# EAGLE board WaterDetector (EAGLE 7.4.0)
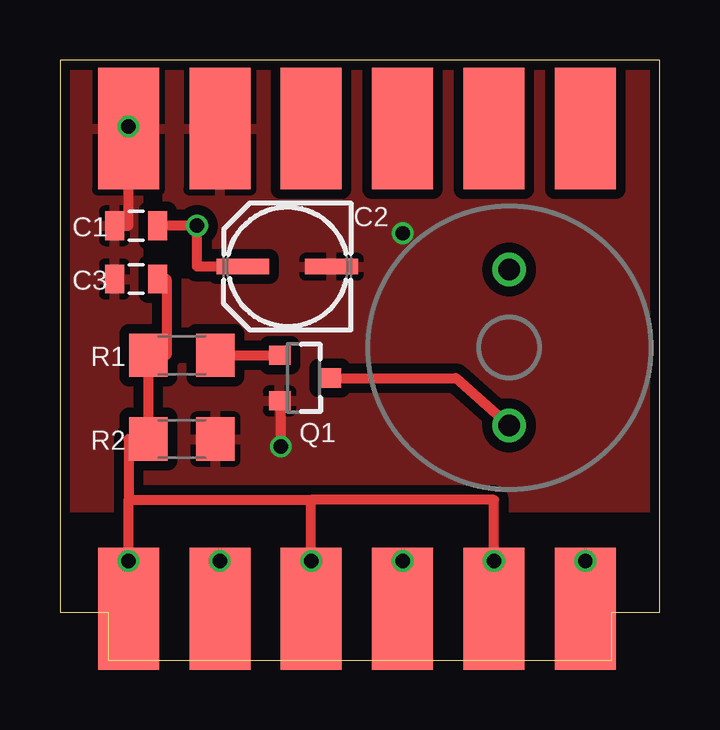
[diagram p0: board, top side]
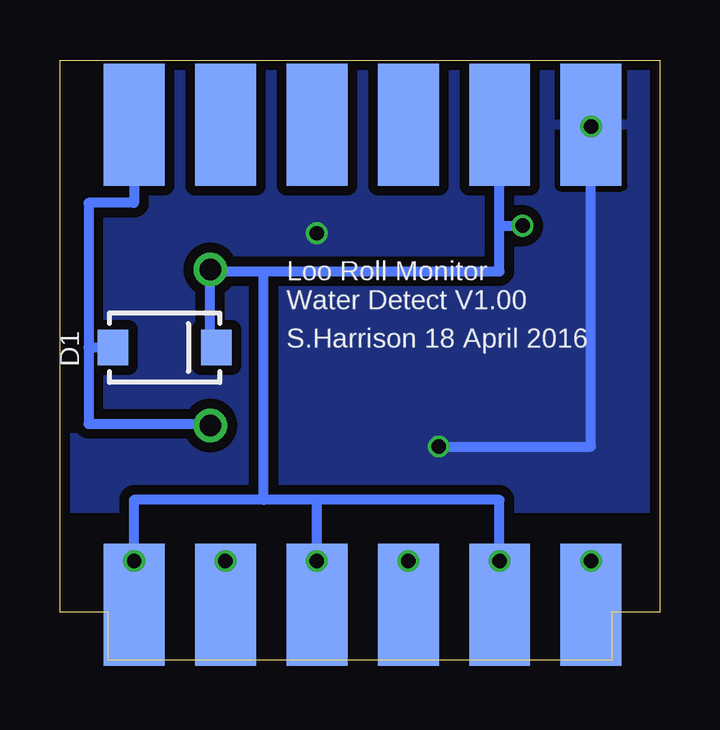
[diagram p1: board, bottom side, seen from below]

Size 25 x 25 mm. Coordinates in mm from the lower left corner, seen from the top.
Outline: 2,0 23,0 23,2 25,2 25,25 0,25 0,2 2,2 2,0
Copper layers (1*16): Top 0.035mm / dielectric 1.5mm / Bottom 0.035mm
Design rules "dirt_cheap_dirty_boards.v1": minimum track width 5mil, minimum drill 12mil, track to track 5mil, track to pad 5mil, pad to pad 5mil, via to via 5mil, smd to smd 0mil, copper to edge 10mil, drill to drill 10mil, minimum pad ring 10mil, minimum via ring 6mil, stop-mask expansion 2mil, vias tented up to drill 25mil, thermal gap 10mil

## Footprints (pad centres in the part's own frame; a part is rotated, then mirrored left to right if it is on the bottom)
0805 = smd 0.8 x 1.2: 1 -0.9,0; 2 0.9,0
PANASONIC_C = smd 2.2 x 0.65: + 1.9,-0.2; - -1.8,-0.2
SMA-DIODE = smd 1.27 x 1.47: A -2.15,0; C 2.15,0
1X06-SMD_EDGE = smd 2.54 x 5.08: 1 0,-0.08; 2 3.81,-0.08; 3 7.62,-0.08; 4 11.43,-0.08; 5 15.24,-0.08; 6 19.05,-0.08
SOT23-3 = smd 0.8 x 0.9: 1 -0.95,-1; 2 0.95,-1; 3 0,1.1
1206 = smd 1.6 x 1.8: 1 -1.4,0; 2 1.4,0
BUZZER-12MM-NS = drill 0.9: + 3.25,0; - -3.25,0

## Placement (x,y rotation side)
C1  [0805]  3.17,18.1 180 top
C2  [PANASONIC_C]  9.53,16.19 180 top
C3  0.1uF  [0805]  3.17,15.88 0 top
D1  MBRA140  [SMA-DIODE]  20.64,13.02 0 bottom
FRAME1  FRAME-LETTER  [CREATIVE_COMMONS]  -8.48,-21.43 0 top  (outside the outline)
JP1  Upper-TopLayer  [1X06-SMD_EDGE]  2.86,22.23 0 top
JP2  Upper-BottomLayer  [1X06-SMD_EDGE]  2.86,22.23 180 bottom
JP3  WaterSensor-Top  [1X06-SMD_EDGE]  2.86,2.22 0 top
JP4  WaterSensor-Bottom  [1X06-SMD_EDGE]  2.86,2.22 180 bottom
Q1  [SOT23-3]  10.16,11.75 270 top
R1  1k  [1206]  5.08,12.7 0 top
R2  1M  [1206]  5.08,9.21 180 top
SG1  BUZZERNS  [BUZZER-12MM-NS]  18.73,13.02 90 top

## Library data of the parts
C1-C3 = SparkFun-Capacitors
D1 = SparkFun-DiscreteSemi; PROD_ID: DIO-08053
FRAME1 = SparkFun-Aesthetics
JP1-JP4 = Tinamous
Q1 = SparkFun-DiscreteSemi; PROD_ID: TRANS-08049
R1 R2 = SparkFun-Resistors
SG1 = SparkFun-Electromechanical

## Nets
3.3V: C1.1 C2.+ D1.C JP2.2 JP3.2 JP3.4 JP3.6 JP4.2 JP4.4 JP4.6 SG1.+
GND: C1.2 C2.- C3.1 JP1.1 JP1.2 JP2.1 Q1.2 R2.1
LEDDRIVE: JP1.3
N$2: Q1.1 R1.2
ROLL2SENSE: JP1.4
ROLL3SENSE: JP1.5
ROLL4SENSE: JP1.6
SENSE: C3.2 JP3.1 JP3.3 JP3.5 JP4.1 JP4.3 JP4.5 R1.1 R2.2
WATERSENSE: D1.A JP2.6 Q1.3 SG1.-

## Tracks (layer width: path | path; a pad name or v marks a point on that pad's centre or on a via)
3.3V  (via drill 0.6)
  Top 0.406: C2.+ 5.71,16.39 v5.71,18.1 C1.1 | JP3.2 v6.67,4.13 | JP3.4 v14.29,4.13 | JP3.6 v21.91,4.13
  Bottom 0.406: D1.C 18.73,13.58 SG1.+ 18.73,16.19 16.51,16.19 | JP4.6 v21.91,4.13 21.91,6.67 16.51,6.67 | 16.51,6.67 16.51,16.19 | JP4.4 v14.29,4.13 14.29,6.67 | 14.29,6.67 16.51,6.67 | JP4.2 v6.67,4.13 6.67,6.67 14.29,6.67 | 16.51,16.19 6.67,16.19 6.67,18.1 | 6.67,18.1 JP2.2 | 6.67,18.1 v5.71,18.1
GND  (via drill 0.6)
  Top 0.406: 2.86,23.81 JP1.1 2.86,18.1 C1.2 | Q1.2 9.21,10.8 v9.21,8.89
  Bottom 0.406: v9.21,8.89 2.86,8.89 JP1.1
  other vias: 2.86,22.23 14.29,17.78
  pour Bottom (isolate 0.406, rank 6): 0,25.4 25.29,25.4 25.29,6.35 0,6.35
  pour Top (isolate 0.406, rank 6): 0,25.4 25.29,25.4 25.29,6.35 0,6.35
N$2
  Top 0.406: R1.2 Q1.1
SENSE  (via drill 0.6)
  Top 0.406: JP3.1 v2.86,4.13 2.86,6.67 | 2.86,6.67 10.48,6.67 | JP3.3 v10.48,4.13 10.48,6.67 | JP3.5 v18.1,4.13 18.1,6.67 10.48,6.67 | 2.86,6.67 2.86,9.21 R2.2 R1.1 4.45,12.7 4.45,15.88 C3.2
  Bottom 0.406: JP4.1 v2.86,4.13 | JP4.3 v10.48,4.13 | JP4.5 v18.1,4.13
WATERSENSE
  Top 0.406: Q1.3 16.51,11.75 SG1.-
  Bottom 0.406: JP2.6 21.91,19.05 23.81,19.05 23.81,13.02 | 23.81,13.02 23.81,9.84 18.73,9.84 SG1.- | D1.A 23.81,13.02

## Text on the board
bNames: Loo Roll Monitor / Water Detect V1.00 | S.Harrison 18 April 2016